# Altium PCB Quid_Pcb_2023-09-17.pcbdoc
Units mm, origin at the board's own origin, x right, y up, seen from the top; angles counter-clockwise.
Board outline 86.37 x 43.95 mm, 2 copper layers (Top Layer, Bottom Layer); 39 components, 28 nets, 131 pads, 59 vias.
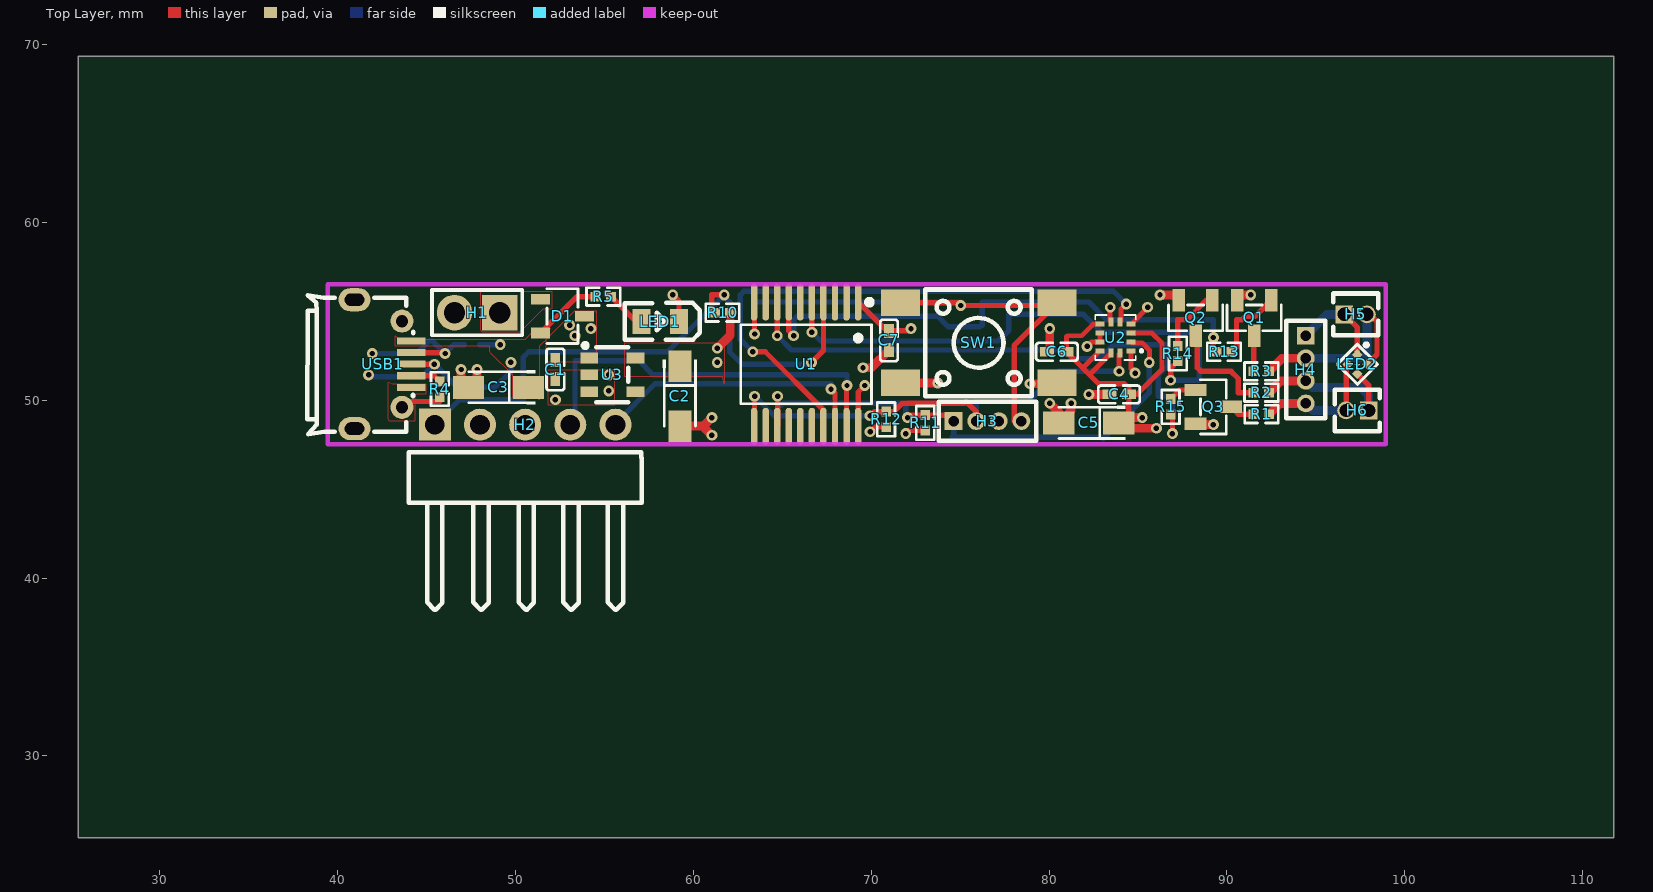
[diagram p0: Top Layer view]
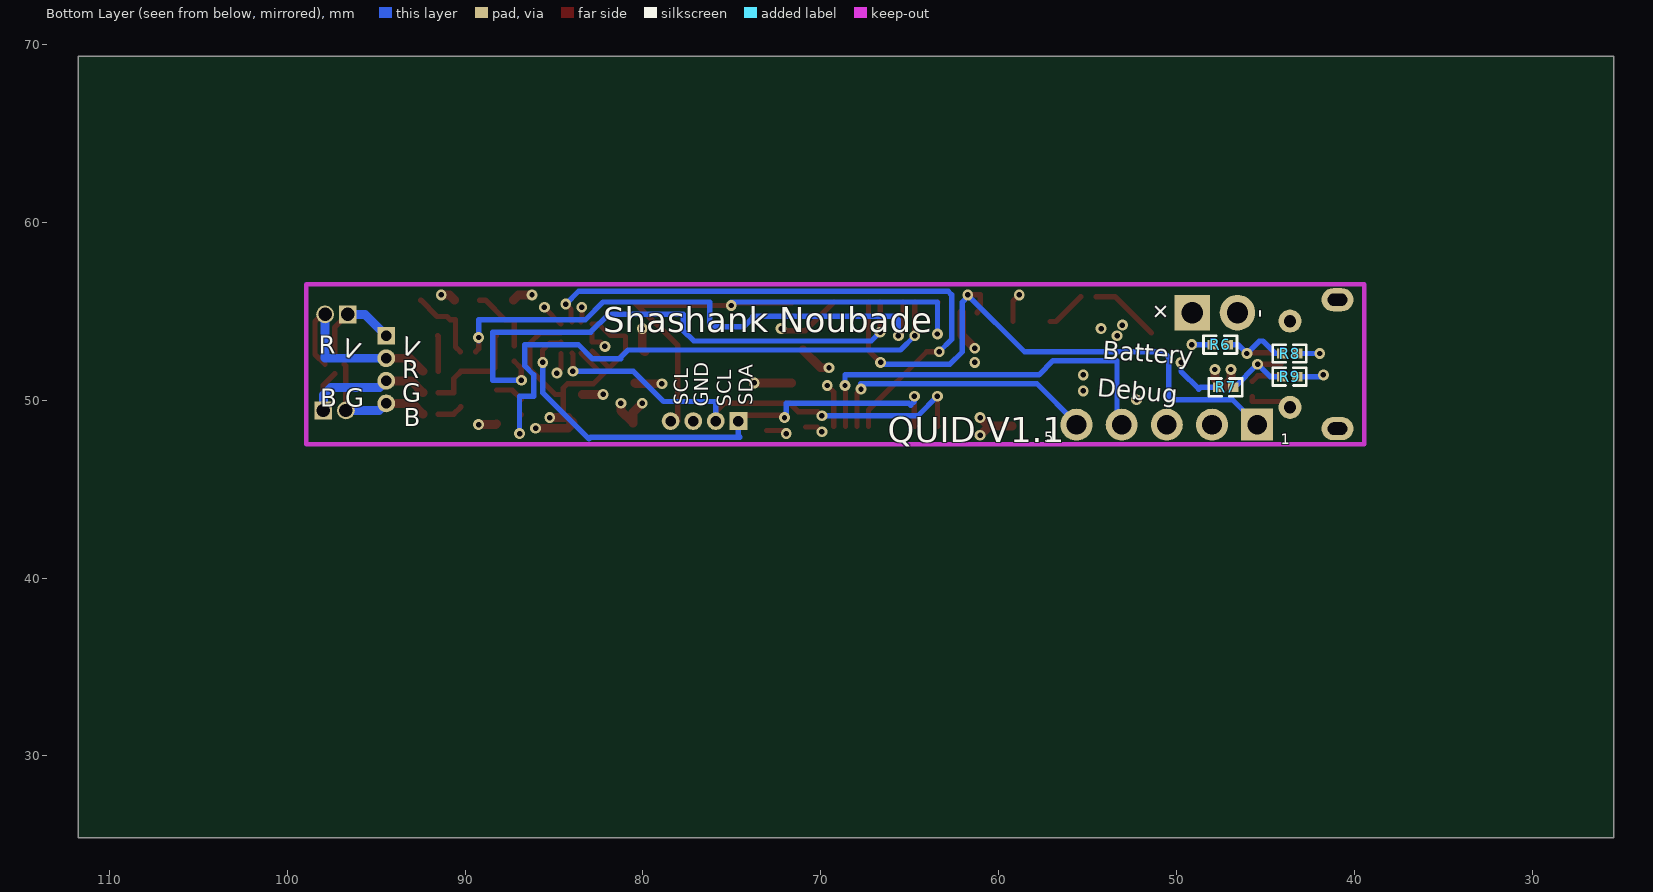
[diagram p1: Bottom Layer view, seen from below]

## Layer stack, top to bottom
Top Layer: signal copper (thickness not stored)
Dielectric: dielectric 0.32, FR-4, Dk 4.8
Bottom Layer: signal copper (thickness not stored)

## Board outline
111.768,25.4 25.4,25.4 25.4,69.354 111.768,69.354

## Components (designator, comment, footprint, x,y, rotation, side; value= is the part's Value field where it differs from the comment)
C1 "1uF" C0402 52.241,51.727 r90 top
C2 "10uF" CAP-SMD_L3.2-W1.6-RD-C7171 59.241,50.227 r270 top
C3 "10uF" CAP-SMD_L3.2-W1.6-RD-C7171 49.041,50.727 r180 top
C4 "100nF" C0402 83.941,50.327 r0 top
C5 "10uF" CAP-SMD_L3.2-W1.6-RD-C7171 82.241,48.727 r180 top
C6 "100nF" C0402 80.441,52.727 r0 top
C7 "100nF" C0402 71.001,53.359 r90 top
D1 "BAT54CLT1G" SOT-23-3_L2.9-W1.6-P1.90-LS2.8-BR 52.641,54.727 r180 top
H1 "X6511WV-02H-C30D60" HDR-TH_2P-P2.54-V-M 47.841,54.927 r180 top
H2 "PZ254R-11-05P" HDR-TH_5P-P2.54-H-M-W10.4 50.541,48.627 r0 top
H3 "PM127V-11-04P-H34" HDR-TH_4P-P1.27-V-F 76.541,48.827 r0 top
H4 "PM127V-11-04P-H34" HDR-TH_4P-P1.27-V-F 94.441,51.727 r270 top
H5 "1.27MM/1*2P" HDR-TH_2P-P1.27-V-M 97.241,54.827 r0 top
H6 "1.27MM/1*2P" HDR-TH_2P-P1.27-V-M 97.341,49.427 r180 top
LED1 "0805G (Green)" LED0805-R-RD 58.141,54.427 r180 top
LED2 "SMLP34RGB2W3C" LED-ARRAY-SMD_4P-L1.00-W1.00-TR 97.341,52.027 r45 top
Q1 "2N7002" SOT-23-3_L2.9-W1.3-P1.90-LS2.4-BR 91.541,54.627 r90 top
Q2 "2N7002" SOT-23-3_L2.9-W1.3-P1.90-LS2.4-BR 88.241,54.627 r90 top
Q3 "2N7002" SOT-23-3_L2.9-W1.3-P1.90-LS2.4-BR 89.241,49.627 r180 top
R1 "560Ω" R0402#1 91.948,49.218 r0 top
R2 "560Ω" R0402#1 91.941,50.427 r0 top
R3 "560Ω" R0402#1 91.941,51.627 r0 top
R4 "0Ω" R0402#1 45.741,50.627 r270 top
R5 "10kΩ" R0402#1 54.941,55.827 r180 top
R6 "5.1kΩ" R0402#2 47.541,53.127 r180 bottom
R7 "5.1kΩ" R0402#2 47.241,50.727 r180 bottom
R8 "10kΩ" R0402#2 43.641,52.627 r180 bottom
R9 "10kΩ" R0402#2 43.641,51.327 r180 bottom
R10 "10kΩ" R0402#1 61.641,54.927 r0 top
R11 "10kΩ" R0402#1 73.041,48.727 r270 top
R12 "10kΩ" R0402#1 70.841,48.927 r270 top
R13 "0Ω" R0402#1 89.841,52.727 r0 top
R14 "0Ω" R0402#1 87.241,52.627 r90 top
R15 "0Ω" R0402#1 86.841,49.627 r90 top
SW1 "K2-1102SP-C3SC-04" SW-SMD_4P-L6.0-W6.0-P4.50-LS9.0 76.041,53.227 r0 top
U1 "PIC16LF1829-I/SS" SSOP-20_L7.2-W5.3-P0.65-LS7.8-BL 66.341,52.027 r180 top
U2 "KXTJ3-1057" LGA-12_L2.0-W2.0-P0.50-BL 83.741,53.527 r90 top
U3 "TPS76350DBVR" SOT-23-5_L3.0-W1.7-P0.95-LS2.8-BR 55.441,51.427 r180 top
USB1 "MICROXNJ" MICRO-USB-SMD_MICROXNJ 42.541,52.027 r270 top

## Footprints (in the part's own frame and the unit in brackets; to place one, negate y for a bottom-side part, rotate by r counter-clockwise, add the part's x,y. Pads: shape width x height; smd on the part's side, far side on the other; paste and mask are expansions set on the pad)
C0402 [mm]
  rect 0.79x0.54 smd paste-100 mask+0.051: 1(-0.545,0) 2(0.545,0)
  silkscreen extent -1.17,-0.5 1.17,0.5
CAP-SMD_L3.2-W1.6-RD-C7171 [mm]
  rect 1.758x1.296 smd paste+0 mask+0.051: 1(-1.686,0) 2(1.686,0)
  silkscreen extent -2.06,-0.95 1.68,0.95
HDR-TH_2P-P1.27-V-M [mm]
  rect 1x1 hole 0.75 paste+0 mask+0.051: 1(-0.635,0)
  round 1 hole 0.75 paste+0 mask+0.051: 2(0.635,0)
  silkscreen extent -1.27,-1.18 1.27,1.18
HDR-TH_2P-P2.54-V-M [mm]
  rect 2x2 hole 1.2 paste+0 mask+0.051: 1(-1.27,0)
  round 2 hole 1.2 paste+0 mask+0.051: 2(1.27,0)
  silkscreen extent -2.54,-1.27 2.54,1.27
HDR-TH_4P-P1.27-V-F [mm]
  rect 1x1 hole 0.6 paste+0 mask+0.051: 1(-1.905,0)
  round 1 hole 0.6 paste+0 mask+0.051: 2(-0.635,0) 3(0.635,0) 4(1.905,0)
  silkscreen extent -2.75,-1.1 2.75,1.1
HDR-TH_5P-P2.54-H-M-W10.4 [mm]
  rect 1.8x1.8 hole 1.1 paste+0 mask+0.051: 1(-5.08,0)
  round 1.8 hole 1.1 paste+0 mask+0.051: 2(-2.54,0) 3(0,0) 4(2.54,0) 5(5.08,0)
  silkscreen extent -6.55,-10.4 6.55,-1.54
LED0805-R-RD [mm]
  rect 1x1.4 smd paste+0 mask+0.051: 1(1.05,0) 2(-1.05,0)
  silkscreen extent -2.22,-1.04 1.99,1.01
LED-ARRAY-SMD_4P-L1.00-W1.00-TR [mm]
  rect 0.43x0.43 smd paste+0 mask+0.051: 1(0.385,0.385) 2(0.385,-0.385) 3(-0.385,-0.385) 4(-0.385,0.385)
  silkscreen extent -0.8,-0.8 1.22,0.8
LGA-12_L2.0-W2.0-P0.50-BL [mm]
  rect 0.28x0.5 smd paste+0 mask+0.051: 1(-0.75,-0.875) 2(-0.25,-0.875) 3(0.25,-0.875) 4(0.75,-0.875) 7(0.75,0.875) 8(0.25,0.875) 9(-0.25,0.875) 10(-0.75,0.875)
  rect 0.5x0.28 smd paste+0 mask+0.051: 5(0.875,-0.25) 6(0.875,0.25) 11(-0.875,0.25) 12(-0.875,-0.25)
  silkscreen extent -1.27,-1.53 1.27,1.14
MICRO-USB-SMD_MICROXNJ [mm]
  rect 0.4x1.6 smd paste-100 mask+0.051: 1(-1.3,1.596) 2(-0.65,1.596) 3(0,1.596) 4(0.65,1.596) 5(1.3,1.596)
  round 1.3 hole 0.7 paste+0 mask+0.051: 6(2.425,1.074) 9(-2.425,1.074)
  oval 1.3x1.8 hole 0.7 slot 1.1 at 90 deg paste+0 mask+0.051: 7(3.625,-1.596) 8(-3.625,-1.596)
  silkscreen extent -3.87,-4.24 3.93,1.71
R0402#1 [mm]
  rect 0.566x0.54 smd paste-100 mask+0.051: 1(-0.433,0) 2(0.433,0)
  silkscreen extent -0.94,-0.5 0.94,0.5
R0402#2 [mm]
  rect 0.566x0.54 smd paste-100 mask+0.051: 1(0.433,0) 2(-0.433,0)
  silkscreen extent -0.94,-0.5 0.94,0.5
SOT-23-3_L2.9-W1.3-P1.90-LS2.4-BR [mm]
  rect 1.25x0.7 smd paste+0 mask+0.051: 1(1,-0.95) 2(1,0.95) 3(-1,0)
  silkscreen extent -0.73,-1.53 0.73,1.53
SOT-23-3_L2.9-W1.6-P1.90-LS2.8-BR [mm]
  rect 1.07x0.6 smd paste+0 mask+0.051: 1(1.235,-0.95) 2(1.235,0.95) 3(-1.235,0)
  silkscreen extent -0.88,-1.54 0.88,1.54
SOT-23-5_L3.0-W1.7-P0.95-LS2.8-BR [mm]
  rect 1x0.6 smd paste+0 mask+0.051: 1(1.3,-0.95) 2(1.3,0) 3(1.3,0.95) 4(-1.3,0.95) 5(-1.3,-0.95)
  silkscreen extent -0.9,-1.78 1.65,1.55
SSOP-20_L7.2-W5.3-P0.65-LS7.8-BL [mm]
  oval 0.364x2.082 smd paste+0 mask+0.051: 1(-2.925,-3.491) 2(-2.275,-3.491) 3(-1.625,-3.491) 4(-0.975,-3.491) 5(-0.325,-3.491) 6(0.325,-3.491) 7(0.975,-3.491) 8(1.625,-3.491) 9(2.275,-3.491) 10(2.925,-3.491) 11(2.925,3.491) 12(2.275,3.491) 13(1.625,3.491) 14(0.975,3.491) 15(0.325,3.491) 16(-0.325,3.491) 17(-0.975,3.491) 18(-1.625,3.491) 19(-2.275,3.491) 20(-2.925,3.491)
  silkscreen extent -3.71,-3.64 3.68,2.22
SW-SMD_4P-L6.0-W6.0-P4.50-LS9.0 [mm]
  rect 2.2x1.5 smd paste+0 mask+0.051: 1(-4.4,2.25) 2(-4.4,-2.25) 3(4.4,2.25) 4(4.4,-2.25)
  silkscreen extent -3,-3 3,3

## Via types
v1: diameter 0.61, hole 0.305, Top Layer to Bottom Layer, tented both sides, 59 vias

## Nets (pads, with @x,y where several pads share a name; then routed paths per layer and width w, separated by ;. In a path a pad name is that pad's centre, name@x,y a point inside that pad or via, vN(x,y) a via of type N, cw(c..) or ccw(c..) an arc to the next point about the centre after c; other vN are vias at no path point)
+3V3: C2.1 C4.2 C5.1 C6.2 C7.2 H2.2 R10.2 R11.2 R12.2 U1.1 U2.3 U2.7 U2.10 U2.11 U3.5 | length 30.4
  Top Layer w0.28: C6.2 80.986,53.572 81.041,53.627 81.841,53.627 82.491,54.277 U2.7 ; 81.897,51.818 U2.10@82.865,52.778 ; 82.239,51.474 82.313,51.474 U2.11 ; C4.2 84.94,50.327 86.342,51.729 86.342,53.225 85.791,53.776 U2.3
  Top Layer w0.3: U1.1 70.879,53.904 C7.2 72.119,53.904 v1(72.241,54.027) ; v1(69.941,48.227) 70.208,48.494 R12.2 ; v1(71.941,48.127) 72.109,48.294 R11.2@73.041,48.294 ; C6.2 82.786,50.926 84.242,50.926 84.485,50.682 C4.2 ; C5.1 84.486,49.286 C4.2
  Top Layer w0.5: v1(61.341,52.927) 62.074,53.66 R10.2 ; v1(85.241,49.027) 84.227,49.027 C5.1 84.227,48.427 v1(86.041,48.427)
  other v1: 61.341,52.127
+5VUSB: C3.1 D1.2 R5.2 R6.2 R7.2 USB1.1 | length 8.1
  Top Layer w0.3: D1.2 53.456,55.827 R5.2
  Bottom Layer w0.3: R7.2 48.641,50.727 48.741,50.627 49.741,51.627 v1(49.741,52.127) ; R6.2 v1(49.141,53.127)
+VBAT: D1.1 H1.1
+VIN: C1.2 D1.3 H4.1 H5.1 LED2.1 U3.1 | length 5.2
  Top Layer w0.3: H5.1 97.341,54.092 LED2.1
  Bottom Layer w0.5: H4.1@94.442,53.631 95.636,54.828 95.743,54.828 H5.1@96.606,54.828
  other v1: 53.341,53.627 54.241,54.027 53.041,54.227
BUTTON: H3.4 SW1.1 SW1.3 U1.10 | length 32.4
  Top Layer w0.3: U1.10 63.441,55.493 v1(63.441,53.727) ; SW1.1 74.891,55.477 v1(75.041,55.327) 80.291,55.327 SW1.3 ; H3.4 78.041,48.826 78.041,53.078 SW1.3@80.442,55.478
  Bottom Layer w0.3: v1@63.442,53.728 63.442,55.527 75.041,55.527 v1(75.041,55.327)
GND: C1.1 C2.2 C3.2 C4.1 C5.2 C6.1 C7.1 H1.2 H2.3 H3.3 LED1.2 Q1.2 Q2.2 Q3.2 R4.2 R8.1 R9.1 SW1.2 SW1.4 U1.20 U2.1 U2.4 U2.6 U2.8 U2.9 U3.2 U3.3 USB1.5 USB1.6 USB1.7 USB1.8 USB1.9 | length 34.3
  Top Layer w0.28: v1(82.141,53.027) 82.391,53.277 U2.9 U2.8 ; v1(83.441,55.227) 83.441,54.452 U2.6 ; 84.616,52.635 84.616,51.752 v1(84.841,51.527) ; U2.4 85.541,55.202 v1(85.541,55.227)
  Top Layer w0.3: USB1.6@43.614,49.603 43.939,49.928 45.74,49.928 R4.2@45.74,50.195 ; v1(58.841,55.927) 59.191,55.577 LED1.2 ; U1.20 69.266,50.451 v1(69.641,50.827)
  Top Layer w0.5: v1(46.941,51.727) 46.941,51.141 C3.2 47.841,51.213 v1(47.841,51.727) ; C2.2 60.527,48.541 v1(61.041,48.027) ; C2.2 60.555,48.541 v1(61.041,49.027) ; v1(69.541,51.827) 70.014,51.827 C7.1 ; SW1.2 v1(73.741,50.977) ; v1(78.941,50.927) 80.391,50.927 SW1.4 ; C6.1 80.041,52.872 v1(80.041,54.027) ; v1(80.041,49.827) 80.555,49.313 C5.2 81.241,49.413 v1(81.241,49.827) ; v1(82.241,50.327) C4.1 ; v1@86.241,55.927 86.991,55.927 Q2.2 ; Q3.2 88.291,48.627 v1@89.241,48.627 ; Q1.2 90.891,55.927 v1@91.341,55.927
  Bottom Layer w0.3: v1(41.741,51.427) 41.841,51.327 R9.1@43.208,51.327 ; v1(41.941,52.627) R8.1
  other v1: 89.241,48.627 52.241,50.027 55.241,50.527 55.241,51.427 86.241,55.927 91.341,55.927
I2C1_SCL: H3.2 R12.1 U1.11 U2.12 | length 26.6
  Top Layer w0.28: v1(83.941,51.627) 83.941,52.602 U2.12
  Top Layer w0.3: U1.11 63.441,48.561 v1(63.441,50.227) ; v1(69.941,49.127) 70.174,49.36 R12.1 71.274,49.36 71.741,49.827 75.241,49.827 75.341,49.927 75.906,49.362 H3.2
  Bottom Layer w0.3: v1(63.441,50.227) 64.541,49.127 v1(69.941,49.127) ; H3.2 75.905,49.892 75.941,49.928 78.842,49.928 80.541,51.627 v1(83.941,51.627)
I2C1_SDA: H3.1 R11.1 U1.13 U2.2 | length 29.7
  Top Layer w0.28: U2.2 84.666,53.227 85.241,53.227 85.641,52.827 v1(85.641,52.127)
  Top Layer w0.3: U1.13 64.741,48.561 v1(64.741,50.227) ; v1(72.041,49.027) 72.174,49.16 R11.1 74.303,49.16 H3.1
  Bottom Layer w0.3: v1(64.741,50.227) 64.741,49.927 64.941,49.727 65.041,49.827 71.941,49.827 71.941,49.127 v1(72.041,49.027) ; H3.1 74.635,48.023 74.541,47.927 82.941,47.927 83.04,47.827 85.641,50.426 v1@85.641,52.128
ICSPCLK: H2.5 U1.18 | length 15.4
  Top Layer w0.3: v1(67.741,50.627) 67.966,50.402 U1.18
  Bottom Layer w0.3: H2.5@55.646,48.727 57.846,50.926 67.767,50.926 v1@67.767,50.726
ICSPDAT: H2.4 U1.19 | length 22.2
  Top Layer w0.3: U1.19 68.616,50.802 v1(68.641,50.827)
  Bottom Layer w0.3: H2.4@53.081,48.628 53.34,48.887 53.34,52.227 56.942,52.227 57.742,51.427 68.641,51.427 v1(68.641,50.827)
INT: U1.17 U2.5 | length 33
  Top Layer w0.28: U2.5 84.041,54.452 84.041,55.104 v1(84.341,55.404) v1@84.341,55.427
  Top Layer w0.3: v1(63.341,52.727) 64.041,52.727 67.315,49.451 U1.17
  Bottom Layer w0.3: v1(63.341,52.727) 62.641,53.426 62.641,55.928 62.842,56.128 83.617,56.128 v1(84.341,55.404)
LED1_1: LED1.1 R5.1 | length 2.3
  Top Layer w0.3: R5.1 56.774,54.427 LED1.1
LED_B: Q2.1 R14.2 | length 3.9
  Top Layer w0.3: R14.2 87.241,54.527 87.764,54.527 88.864,55.627 Q2.1
LED_B_ON: H4.3 H6.1 LED2.3 R2.2 | length 9.4
  Top Layer w0.3: LED2.3 97.976,50.848 H6.1
  Top Layer w0.5: R2.2 93.039,51.092 H4.3@94.441,51.092
  Bottom Layer w0.5: H4.3@94.441,51.092 94.806,50.727 97.541,50.727 97.976,50.292 H6.1
LED_B_R: R14.1 U1.5 | length 30.8
  Top Layer w0.3: v1(66.666,53.827) U1.5 ; v1(86.841,51.127) 86.841,51.794 R14.1
  Bottom Layer w0.3: v1(66.666,53.827) 67.166,53.327 77.141,53.327 77.741,53.927 77.741,54.827 81.941,54.827 82.941,53.827 88.441,53.827 88.441,51.127 v1(86.841,51.127)
LED_G: Q3.1 R15.2 | length 1.6
  Top Layer w0.3: R15.2 87.358,50.577 Q3.1
LED_G_ON: H4.4 H6.2 LED2.4 R1.2 | length 7.4
  Top Layer w0.3: H6.2 96.706,51.937 LED2.4
  Top Layer w0.5: R1.2 92.984,49.822 H4.4@94.441,49.822
  Bottom Layer w0.5: H4.4@94.441,49.822 94.836,49.427 H6.2
LED_G_R: R15.1 U1.8 | length 31.9
  Top Layer w0.3: v1(64.716,53.627) U1.8 ; R15.1 86.941,49.094 v1(86.941,48.127)
  Bottom Layer w0.3: v1(64.716,53.627) 65.517,52.826 67.249,52.826 80.841,52.826 81.242,52.427 81.242,52.326 82.842,52.326 83.642,53.126 86.642,53.126 86.642,51.927 86.142,51.427 86.142,50.228 86.942,50.228 v1(86.941,48.127)
LED_R: Q1.1 R13.2 | length 4.3
  Top Layer w0.3: R13.2 90.541,52.994 90.541,54.527 90.841,54.527 91.024,54.71 91.574,54.71 Q1.1
LED_R_ON: H4.2 H5.2 LED2.2 R3.2 | length 11.6
  Top Layer w0.3: H5.2 98.041,54.827 98.441,54.427 98.441,52.583 LED2.2
  Top Layer w0.5: R3.2 93.109,52.362 H4.2@94.441,52.362
  Bottom Layer w0.5: H4.2@94.442,52.361 97.876,52.361 H5.2@97.876,54.828
LED_R_R: R13.1 U1.7 | length 30.7
  Top Layer w0.3: U1.7 65.366,53.902 v1(65.641,53.627) ; v1(89.241,53.527) 89.241,52.894 R13.1
  Bottom Layer w0.3: v1(65.641,53.627) 65.641,54.527 65.841,54.727 73.841,54.727 73.841,54.627 74.341,54.127 76.093,54.127 76.241,54.226 76.241,55.526 82.24,55.526 83.241,54.528 89.24,54.528 v1@89.24,53.327
MCLR#/VPP: H2.1 R10.1 U1.4 | length 34.4
  Top Layer w0.3: R10.1 61.041,55.094 61.041,55.927 v1@61.741,55.927 ; v1(66.641,52.127) 67.316,52.802 U1.4
  Bottom Layer w0.3: H2.1@45.461,48.628 46.86,50.027 50.442,50.027 50.442,52.427 50.742,52.727 58.542,52.727 v1(61.741,55.927) ; v1@61.741,55.927 61.741,55.827 62.041,55.527 62.041,52.727 62.741,52.027 66.541,52.027 v1(66.641,52.127)
R1_1: Q3.3 R1.1 | length 1.4
  Top Layer w0.3: Q3.3 90.65,49.218 R1.1
R2_1: Q2.3 R2.1 | length 6.1
  Top Layer w0.3: Q2.3 88.341,53.527 88.341,51.827 88.541,51.627 90.241,51.627 90.641,51.227 90.641,50.427 R2.1
R3_1: Q1.3 R3.1 | length 2
  Top Layer w0.3: R3.1 91.508,53.594 Q1.3
USB1_2: R6.1 R8.2 USB1.2 | length 5.7
  Top Layer w0.3: USB1.2 45.991,52.677 v1(46.041,52.627)
  Bottom Layer w0.3: R8.2 44.441,52.627 45.141,53.327 45.341,53.327 v1(46.041,52.627) 46.541,53.127 R6.1
USB1_3: R7.1 R9.2 USB1.3 | length 4.9
  Top Layer w0.3: USB1.3 v1(45.441,52.027)
  Bottom Layer w0.3: R9.2@44.074,51.327 44.741,51.327 v1(45.441,52.027) 46.741,50.727 R7.1
USB1_4: R4.1 USB1.4 | length 1.7
  Top Layer w0.3: USB1.4 45.424,51.377 R4.1
pads on no net: U1.2 U1.3 U1.6 U1.9 U1.12 U1.14 U1.15 U1.16 U3.4
copper on no net: | length 0

## Polygon pours and split planes (outlines as drawn)
GND on Mid-Layer 2 (solid): 39.691,47.727 94.441,47.727 94.441,47.827 94.441,56.327 39.691,56.327 39.691,47.727 39.791,47.727
+VIN on Mid-Layer 1 (solid): 53.041,56.027 52.908,56.06 52.941,56.027 53.041,56.027
+VIN on Mid-Layer 1 (solid): 52.641,52.827 52.641,56.227 95.141,56.227 95.141,53.127 95.141,51.727 89.541,51.827 83.441,51.927 81.241,54.727 68.841,54.727 68.741,54.827 58.041,54.827 56.041,52.827 52.641,52.827
+3V3 on Mid-Layer 1 (solid): 39.841,47.827 39.741,47.727 39.741,56.127 39.841,56.227 95.041,56.227 95.141,56.127 95.141,47.827 39.841,47.827
+3V3 on Top Layer (solid): 61.741,50.927 61.641,51.327 56.141,51.327 56.141,53.227 61.741,53.227 61.741,50.927
+VIN on Top Layer (solid): 54.541,55.027 54.541,52.127 51.841,52.127 51.741,52.227 51.741,53.427 53.341,55.027 54.541,55.027 54.541,54.927
GND on Top Layer (solid): 51.841,49.727 51.841,51.727 55.541,51.727 55.541,49.727 51.841,49.727
+VBAT on Top Layer (solid): 48.141,53.827 48.041,53.927 48.041,55.827 48.041,56.127 48.741,56.127 48.841,56.127 52.041,56.127 52.041,55.127 51.541,55.127 50.241,53.827 48.141,53.827
+5VUSB on Top Layer (solid): 51.941,54.027 51.841,53.927 51.841,53.527 51.341,53.027 51.341,50.027 51.241,50.127 49.841,50.127 49.841,51.427 48.641,52.627 48.541,52.727 48.541,53.027 43.241,53.027 43.241,53.627 43.441,53.427 50.541,53.427 50.941,53.827 51.141,53.827
GND on Top Layer (solid): 44.341,50.327 44.341,48.827 42.941,48.827 42.841,48.927 42.841,51.027 43.041,50.927 44.941,50.927 44.941,50.327 44.341,50.327

## Silkscreen, mask and mechanical layers (free items; w line width, h text height)
Bottom Overlay:
  text "-" at 45.641,55.127 h1 r90
  text "+" at 50.987,54.273 h1 r315
  text "Shashank Noubade" at 82.241,53.827 h1.4
  text "V" at 93.72,52.66 h1 r21
  text "R" at 98.241,52.627 h1
  text "V" at 97.02,52.56 h1 r21
  text "Battery" at 54.176,52.328 h1 r4
  text "R" at 93.541,51.227 h1
  text "Debug" at 54.485,50.229 h1 r5
  text "G" at 93.541,49.927 h1
  text "SDA" at 73.841,49.727 h0.8 r270
  text "SCL" at 77.441,49.727 h0.8 r270
  text "SCL" at 75.041,49.627 h0.8 r270
  text "GND" at 76.341,49.627 h0.8 r270
  text "G" at 96.741,49.627 h1
  text "B" at 98.141,49.627 h1
  text "B" at 93.441,48.527 h1
  text "5" at 57.441,47.627 h0.6
  text "QUID V1.1" at 66.241,47.627 h1.4
  text "1" at 44.141,47.527 h0.6